# EAGLE board parallel_paths_v1.0_200um (EAGLE 6.5.0)
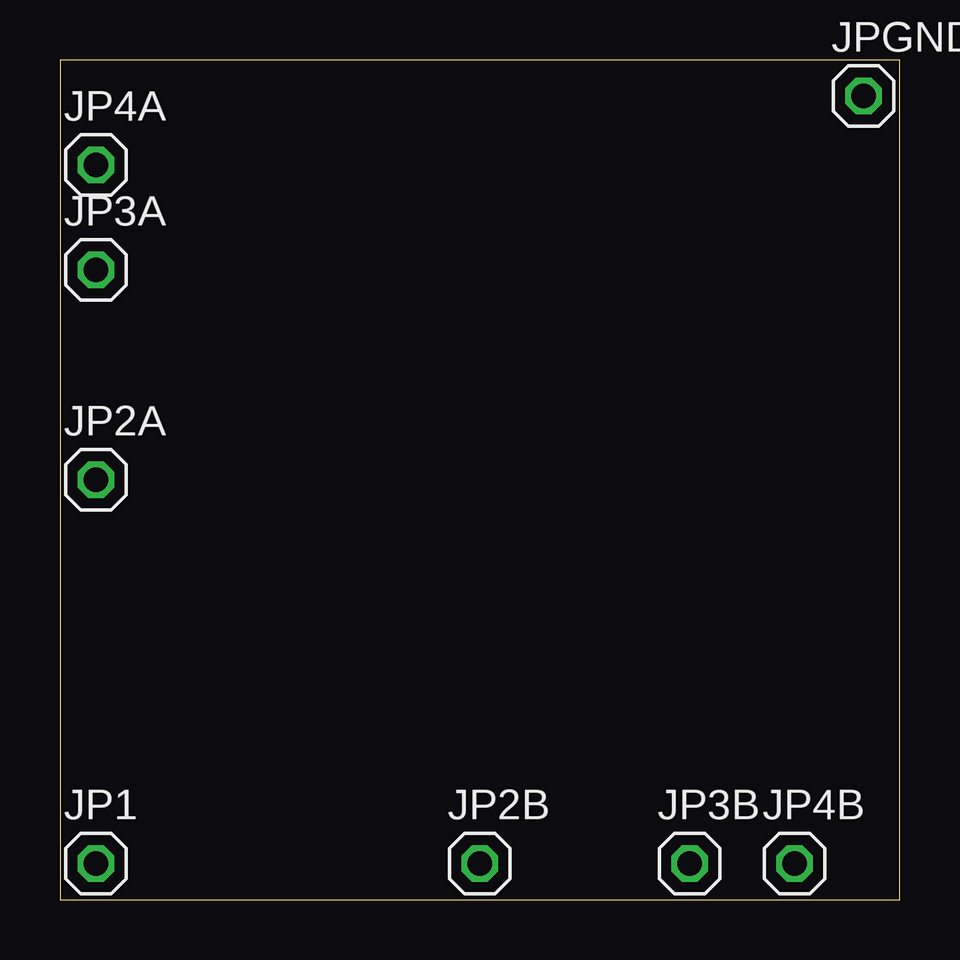
[diagram p0: board, top side]
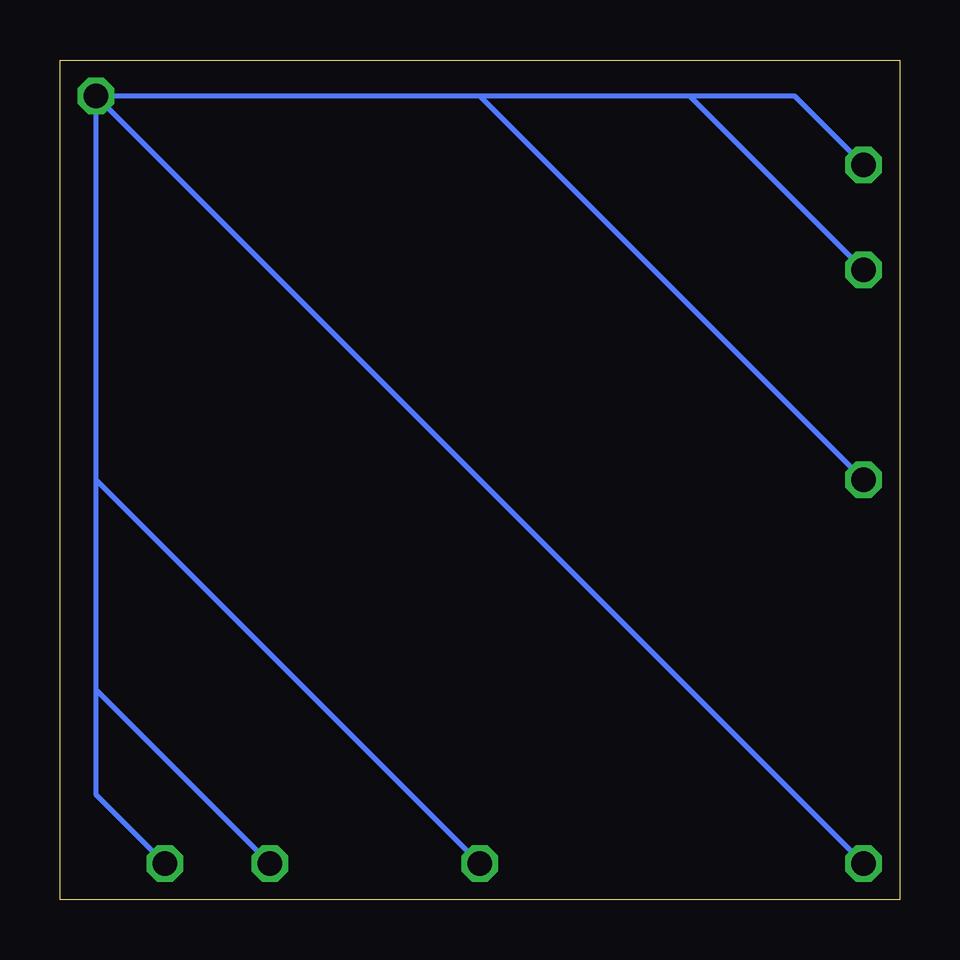
[diagram p1: board, bottom side, seen from below]

Size 35 x 35 mm. Coordinates in mm from the lower left corner, seen from the top.
Outline: 0,0 35,0 35,35 0,35 0,0
Copper layers (1*16): Top 0.035mm / dielectric 1.5mm / Bottom 0.035mm
Design rules "default": minimum track width 10mil, minimum drill 24mil, track to track 8mil, track to pad 8mil, pad to pad 8mil, via to via 8mil, smd to smd 8mil, copper to edge 40mil, drill to drill 8mil, minimum pad ring 10mil, minimum via ring 8mil, stop-mask expansion 4mil, vias tented up to drill 0mil, thermal gap 10mil
Net classes: 0 default: width 0.203 mm

## Footprints (pad centres in the part's own frame; a part is rotated, then mirrored left to right if it is on the bottom)
1X01 = drill 1.016 octagon: 1 0,0

## Placement (x,y rotation side)
JP1  [1X01]  1.5,1.5 0 top
JP2A  [1X01]  1.5,17.5 0 top
JP2B  [1X01]  17.5,1.5 0 top
JP3A  [1X01]  1.5,26.25 0 top
JP3B  [1X01]  26.25,1.5 0 top
JP4A  [1X01]  1.5,30.62 0 top
JP4B  [1X01]  30.62,1.5 0 top
JPGND  [1X01]  33.5,33.5 0 top

## Library data of the parts
JP1 JP2A JP2B JP3A JP3B JP4A JP4B JPGND = pinhead

## Nets
N$1: JP1.1 JP2A.1 JP2B.1 JP3A.1 JP3B.1 JP4A.1 JP4B.1 JPGND.1

## Tracks (layer width: path | path; a pad name or v marks a point on that pad's centre or on a via)
N$1
  Bottom 0.2: JP4A.1 4.38,33.5 8.75,33.5 | JP3A.1 8.75,33.5 | 8.75,33.5 17.5,33.5 | JP2A.1 17.5,33.5 | 17.5,33.5 JPGND.1 | JP1.1 JPGND.1 | JP2B.1 33.5,17.5 | 33.5,17.5 JPGND.1 | JP3B.1 33.5,8.75 | 33.5,8.75 33.5,9.5 33.5,17.5 | JP4B.1 33.5,4.38 33.5,8.75